# Altium PCB TEST_BOEAD.PcbDoc
Units mil, origin at the board's own origin, x right, y up, seen from the top; angles counter-clockwise.
Board outline 2275 x 3405 mil, 2 copper layers (Top Layer, Bottom Layer); 42 components, 40 nets, 124 pads, 0 vias.
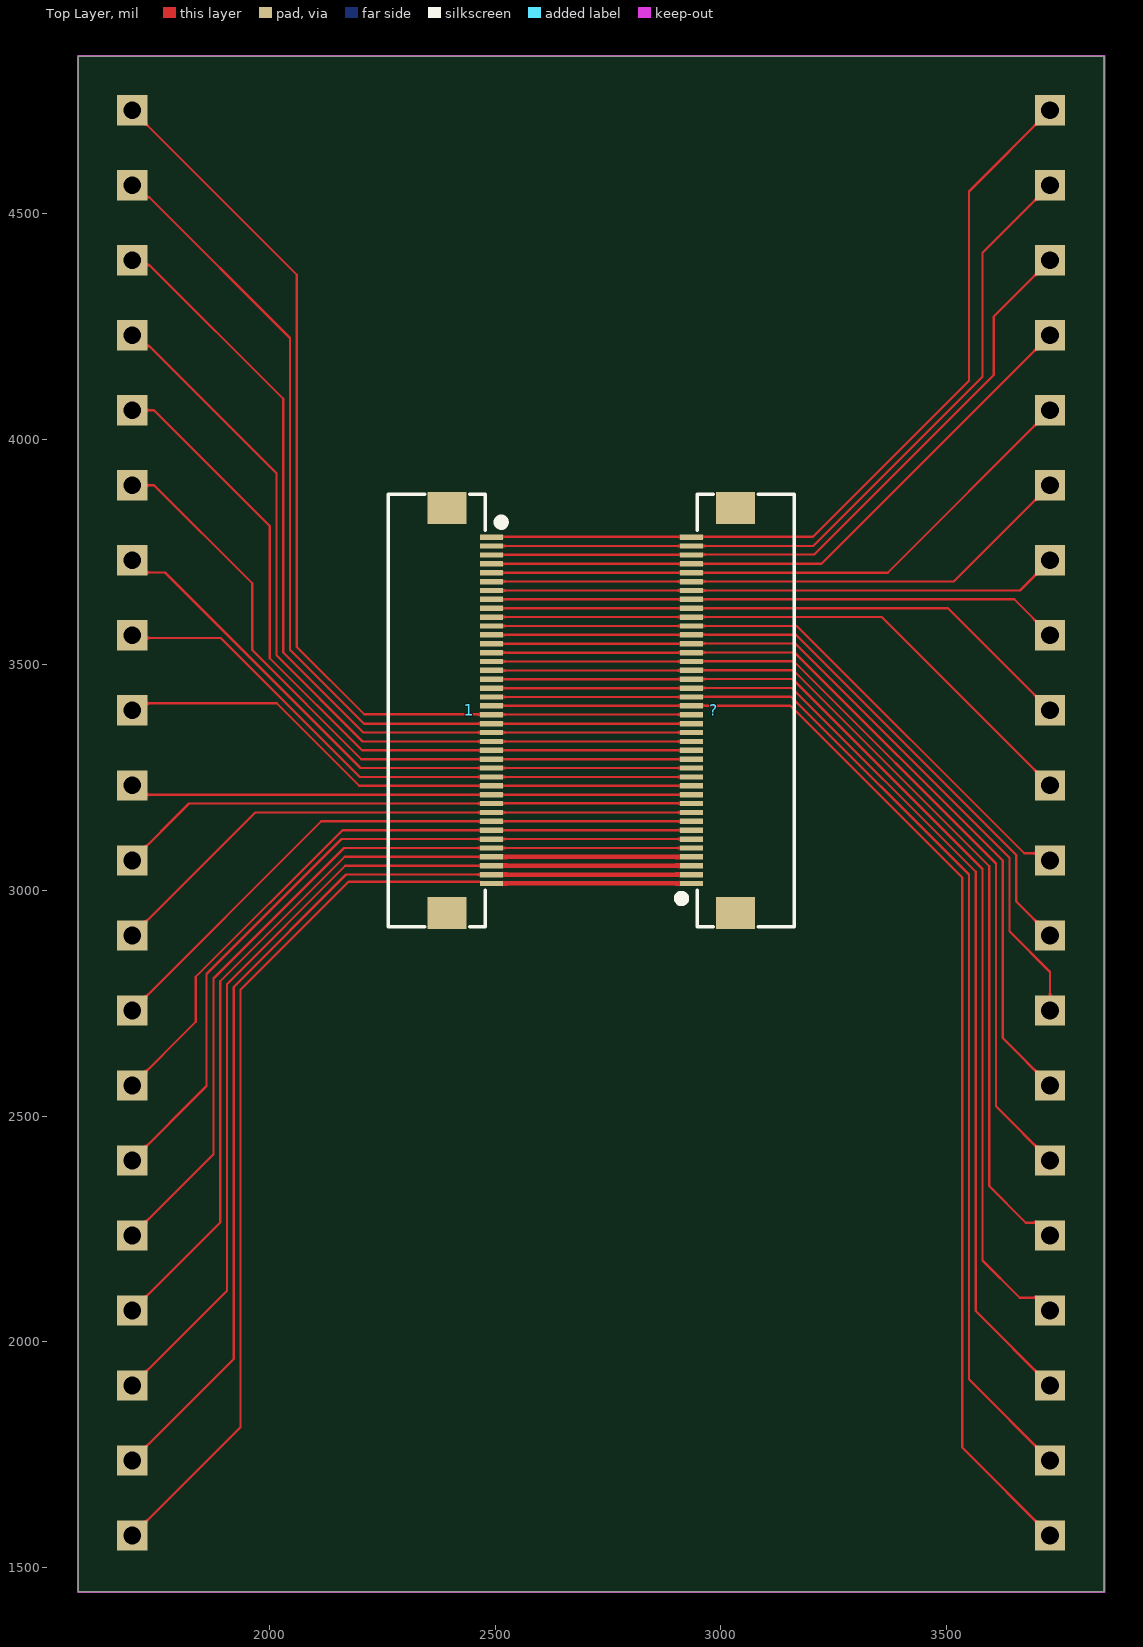
[diagram p0: Top Layer view]
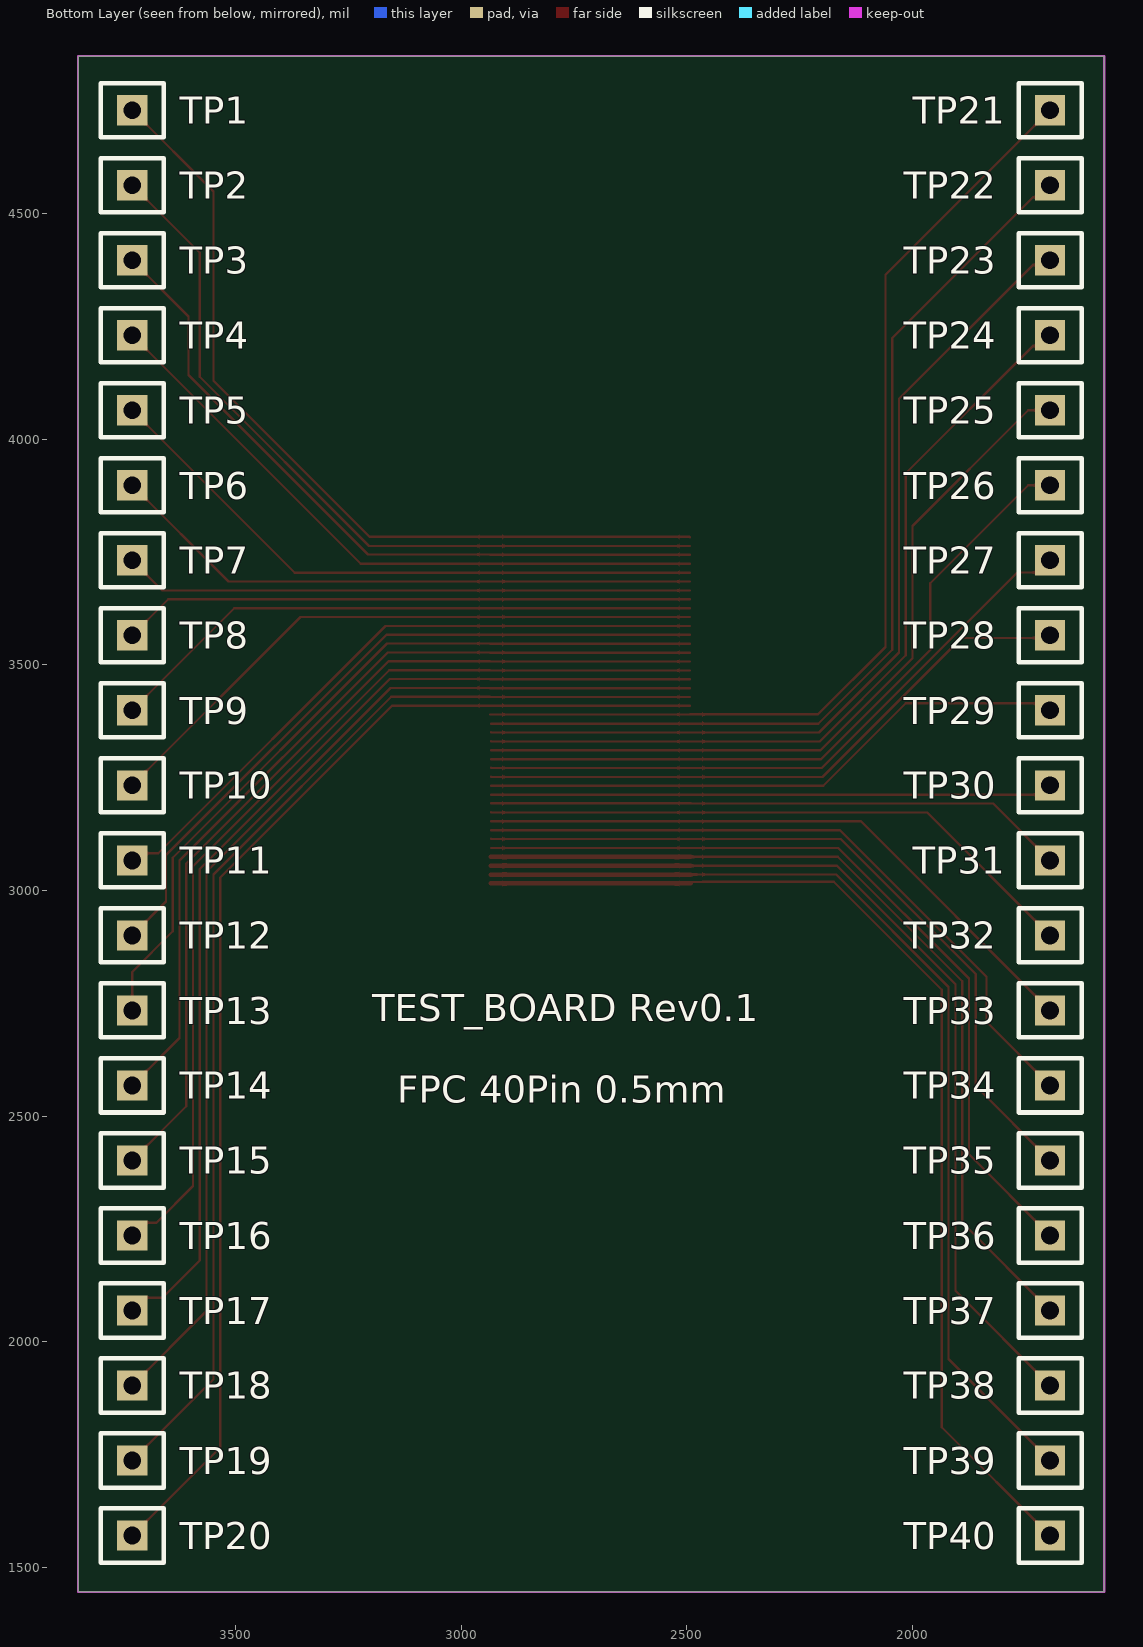
[diagram p1: Bottom Layer view, seen from below]

## Layer stack, top to bottom
Top Solder: solder mask 0.4, Solder Resist, Dk 3.5
Top Layer: signal copper 1.4
Dielectric 1: dielectric 12.6, FR-4, Dk 4.8
Bottom Layer: signal copper 1.4
Bottom Solder: solder mask 0.4, Solder Resist, Dk 3.5

## Board outline
1575,1445 1575,4850 3850,4850 3850,1445

## Design rules (kind name [scope] priority, off if disabled: settings)
Clearance [All] p1: gap=5 ignorepadtopadclearanceinfootprint=FALSE
PolygonConnect [All] p1: connectstyle=Relief reliefconductorwidth=10 reliefentries=4 polygonreliefangle="90 Angle" airgapwidth=10
RoomDefinition Sheet4 [InComponentClass('Sheet4')] p1: confinementstyle=ConfineIn formatcopy=TRUE lockcomponents=FALSE outline 7045,1060 17005,1060 17005,2050 7045,2050
RoutingVias [All] p1: holewidth=7.87 width=15.75 viastyle="Through Hole" minholewidth=7.87 minwidth=15.75 maxholewidth=7.87 maxwidth=15.75
SolderMaskExpansion [All] p1: expansion=4 istentingtop=FALSE
Width [All] p1: maxlimit=20 minlimit=5 preferedwidth=10
30 further rules are at their usual default settings.

## Components (designator, comment, footprint, x,y, rotation, side; value= is the part's Value field where it differs from the comment)
1 "FPC1.0-40P" "FPC0.5 2H-WS-40P" 2393,3399.47 r270 top
? "FPC1.0-40P" "FPC0.5 2H-WS-40P" 3033,3399.47 r90 top
TP1 "TEST TP" "TEST TP1.4_B" 3730,4730 r180 bottom
TP2 "TEST TP" "TEST TP1.4_B" 3730,4563.68 r180 bottom
TP3 "TEST TP" "TEST TP1.4_B" 3730,4397.37 r180 bottom
TP4 "TEST TP" "TEST TP1.4_B" 3730,4231.05 r180 bottom
TP5 "TEST TP" "TEST TP1.4_B" 3730,4064.74 r180 bottom
TP6 "TEST TP" "TEST TP1.4_B" 3730,3898.42 r180 bottom
TP7 "TEST TP" "TEST TP1.4_B" 3730,3732.1 r180 bottom
TP8 "TEST TP" "TEST TP1.4_B" 3730,3565.79 r180 bottom
TP9 "TEST TP" "TEST TP1.4_B" 3730,3399.47 r180 bottom
TP10 "TEST TP" "TEST TP1.4_B" 3730,3233.16 r180 bottom
TP11 "TEST TP" "TEST TP1.4_B" 3730,3066.84 r180 bottom
TP12 "TEST TP" "TEST TP1.4_B" 3730,2900.53 r180 bottom
TP13 "TEST TP" "TEST TP1.4_B" 3730,2734.21 r180 bottom
TP14 "TEST TP" "TEST TP1.4_B" 3730,2567.89 r180 bottom
TP15 "TEST TP" "TEST TP1.4_B" 3730,2401.58 r180 bottom
TP16 "TEST TP" "TEST TP1.4_B" 3730,2235.26 r180 bottom
TP17 "TEST TP" "TEST TP1.4_B" 3730,2068.95 r180 bottom
TP18 "TEST TP" "TEST TP1.4_B" 3730,1902.63 r180 bottom
TP19 "TEST TP" "TEST TP1.4_B" 3730,1736.32 r180 bottom
TP20 "TEST TP" "TEST TP1.4_B" 3730,1570 r180 bottom
TP21 "TEST TP" "TEST TP1.4_B" 1695,4730 r180 bottom
TP22 "TEST TP" "TEST TP1.4_B" 1695,4563.68 r180 bottom
TP23 "TEST TP" "TEST TP1.4_B" 1695,4397.37 r180 bottom
TP24 "TEST TP" "TEST TP1.4_B" 1695,4231.05 r180 bottom
TP25 "TEST TP" "TEST TP1.4_B" 1695,4064.74 r180 bottom
TP26 "TEST TP" "TEST TP1.4_B" 1695,3898.42 r180 bottom
TP27 "TEST TP" "TEST TP1.4_B" 1695,3732.1 r180 bottom
TP28 "TEST TP" "TEST TP1.4_B" 1695,3565.79 r180 bottom
TP29 "TEST TP" "TEST TP1.4_B" 1695,3399.47 r180 bottom
TP30 "TEST TP" "TEST TP1.4_B" 1695,3233.16 r180 bottom
TP31 "TEST TP" "TEST TP1.4_B" 1695,3066.84 r180 bottom
TP32 "TEST TP" "TEST TP1.4_B" 1695,2900.53 r180 bottom
TP33 "TEST TP" "TEST TP1.4_B" 1695,2734.21 r180 bottom
TP34 "TEST TP" "TEST TP1.4_B" 1695,2567.89 r180 bottom
TP35 "TEST TP" "TEST TP1.4_B" 1695,2401.58 r180 bottom
TP36 "TEST TP" "TEST TP1.4_B" 1695,2235.26 r180 bottom
TP37 "TEST TP" "TEST TP1.4_B" 1695,2068.95 r180 bottom
TP38 "TEST TP" "TEST TP1.4_B" 1695,1902.63 r180 bottom
TP39 "TEST TP" "TEST TP1.4_B" 1695,1736.32 r180 bottom
TP40 "TEST TP" "TEST TP1.4_B" 1695,1570 r180 bottom

## Footprints (in the part's own frame and the unit in brackets; to place one, negate y for a bottom-side part, rotate by r counter-clockwise, add the part's x,y. Pads: shape width x height; smd on the part's side, far side on the other; paste and mask are expansions set on the pad)
"FPC0.5 2H-WS-40P" [mm] "长：24.2mm，宽：5.2mm，高：2mm"
  rect 1.8x2.2 smd: 0(-11.4,0) 0(11.4,0)
  rect 0.3x1.3 smd: 1(-9.75,2.497) 2(-9.25,2.497) 3(-8.75,2.497) 4(-8.25,2.497) 5(-7.75,2.497) 6(-7.25,2.497) 7(-6.75,2.497) 8(-6.25,2.497) 9(-5.75,2.497) 10(-5.25,2.497) 11(-4.75,2.497) 12(-4.25,2.497) 13(-3.75,2.497) 14(-3.25,2.497) 15(-2.75,2.497) 16(-2.25,2.497) 17(-1.75,2.497) 18(-1.25,2.497) 19(-0.75,2.497) 20(-0.25,2.497) 21(0.25,2.497) 22(0.75,2.497) 23(1.25,2.497) 24(1.75,2.497) 25(2.25,2.497) 26(2.75,2.497) 27(3.25,2.497) 28(3.75,2.497) 29(4.25,2.497) 30(4.75,2.497) 31(5.25,2.497) 32(5.75,2.497) 33(6.25,2.497) 34(6.75,2.497) 35(7.25,2.497) 36(7.75,2.497) 37(8.25,2.497) 38(8.75,2.497) 39(9.25,2.497) 40(9.75,2.497)
  silkscreen extent -12.18,-3.3 12.18,3.23, body extent -12.1,-3.15 12.1,2.85, height 2
"TEST TP1.4_B" [mm] "蓝色，测试环"
  rect 1.7x1.7 hole 1: 1(0,0)
  silkscreen extent -1.78,-1.52 1.78,1.52, body extent -1.67,-1.4 1.67,1.4, height 5.41

## Part data
1 ?: library part FPC-40P, "FPC连接器", BOM名称=FPC连接器, 学习资源=www.ooocke.com, 版权归属=源创客
TP1 TP2 TP3 TP4 TP5 TP6 TP7 TP8 TP9 TP10 TP11 TP12 TP13 TP14 TP15 TP16 TP17 TP18 TP19 TP20 TP21 TP22 TP23 TP24 TP25 TP26 TP27 TP28 TP29 TP30 TP31 TP32 TP33 TP34 TP35 TP36 TP37 TP38 TP39 TP40: "测试环", BOM名称=测试环, 学习资源=www.ooocke.com, 版权归属=源创客

## Nets (pads, with @x,y where several pads share a name; then routed paths per layer and width w, separated by ;. In a path a pad name is that pad's centre, name@x,y a point inside that pad or via, vN(x,y) a via of type N, cw(c..) or ccw(c..) an arc to the next point about the centre after c; other vN are vias at no path point)
Net1_1: 1.1 ?.40 TP1.1 | length 1874.8
  Top Layer w5: 1.1@2493.31,3783.33 2494.21,3784.24 3204.14,3784.24 3550,4130.1 3550,4550 TP1.1
Net1_2: 1.2 ?.39 TP2.1 | length 1729.1
  Top Layer w5: 1.2@2493.31,3763.65 3204.76,3763.65 3580,4138.88 3580,4413.68 TP2.1
Net1_3: 1.3 ?.38 TP3.1 | length 1582.4
  Top Layer w5: 1.3@2493.83,3744.49 ?.38@2936.69,3744.49 ; ?.38@2936.69,3744.87 3207.2,3744.87 3605,4142.67 3605,4272.37 TP3.1
Net1_4: 1.4 ?.37 TP4.1 | length 1446.6
  Top Layer w5: 1.4@2493.31,3724.28 3223.22,3724.28 TP4.1
Net1_5: 1.5 ?.36 TP5.1 | length 1385.9
  Top Layer w5: 1.5@2493.31,3704.59 3369.86,3704.59 TP5.1
Net1_6: 1.6 ?.35 TP6.1 | length 1325.1
  Top Layer w5: 1.6@2493.31,3684.91 3516.49,3684.91 TP6.1
Net1_7: 1.7 ?.34 TP7.1 | length 1264.4
  Top Layer w5: 1.7@2493.31,3665.22 3663.12,3665.22 TP7.1
Net1_8: 1.8 ?.33 TP8.1 | length 1269.7
  Top Layer w5: 1.8@2493.31,3645.54 2936.69,3645.54 3650.25,3645.54 TP8.1
Net1_9: 1.9 ?.32 TP9.1 | length 1330.5
  Top Layer w5: 1.9@2493.31,3625.85 3503.62,3625.85 TP9.1
Net1_10: 1.10 ?.31 TP10.1 | length 1391.2
  Top Layer w5: 1.10@2493.31,3606.17 3356.99,3606.17 TP10.1
Net1_11: 1.11 ?.30 TP11.1 | length 1451.9
  Top Layer w5: 1.11@2493.31,3586.48 2936.69,3586.48 3168.52,3586.48 3672.39,3082.61 3714.24,3082.61 TP11.1
Net1_12: 1.12 ?.29 TP12.1 | length 1573.6
  Top Layer w5: 1.12@2493.31,3566.8 2936.69,3566.8 2937.22,3567.32 3166.46,3567.32 3655,3078.79 3655,2975.53 TP12.1
Net1_13: 1.13 ?.28 TP13.1 | length 1719.3
  Top Layer w5: 1.13@2493.31,3547.11 2936.69,3547.11 2937.22,3547.64 3164.94,3547.64 3640,3072.57 3640,2909.45 3730,2819.45 TP13.1
Net1_14: 1.14 ?.27 TP14.1 | length 1865.1
  Top Layer w5: 1.14@2493.31,3527.43 2936.69,3527.43 2937.22,3527.95 3163.41,3527.95 3625,3066.36 3625,2672.89 TP14.1
Net1_15: 1.15 ?.26 TP15.1 | length 2010.8
  Top Layer w5: 1.15@2493.31,3507.74 2936.69,3507.74 2937.22,3508.27 3161.88,3508.27 3610,3060.15 3610,2521.58 TP15.1
Net1_16: 1.16 ?.25 TP16.1 | length 2171.3
  Top Layer w5: 1.16@2493.31,3488.06 2936.69,3488.06 2937.22,3488.58 3160.35,3488.58 3595,3053.93 3595,2345 3676.27,2263.73 3701.54,2263.73 TP16.1
Net1_17: 1.17 ?.24 TP17.1 | length 2325.3
  Top Layer w5: 1.17@2493.31,3468.37 2493.57,3468.63 2936.43,3468.63 2936.69,3468.37 2937.22,3468.9 3158.82,3468.9 3580,3047.72 3580,2180 3662.59,2097.41 3701.54,2097.41 TP17.1
Net1_18: 1.18 ?.23 TP18.1 | length 2448
  Top Layer w5: 1.18@2493.31,3448.69 2936.69,3448.69 2937.22,3449.21 3157.3,3449.21 3565,3041.51 3565,2067.63 TP18.1
Net1_19: 1.19 ?.22 TP19.1 | length 2593.7
  Top Layer w5: 1.19@2493.31,3429 2936.69,3429 2937.22,3429.53 3155.77,3429.53 3550,3035.29 3550,1916.32 TP19.1
Net1_20: 1.20 ?.21 TP20.1 | length 2737.8
  Top Layer w5: 1.20@2493.83,3409.84 ?.21@2936.69,3409.84 ; ?.21@2937.6,3409.84 3154.24,3409.84 3535,3029.08 3535,1765 TP20.1
Net1_21: 1.21 ?.20 TP21.1 | length 2279.3
  Top Layer w5: TP21.1 2060,4365 2060,3540 2209.46,3390.54 1.21@2493.31,3390.54 ; 1.21@2493.84,3390.16 ?.20@2936.69,3390.16
Net1_22: 1.22 ?.19 TP22.1 | length 2139.3
  Top Layer w5: TP22.1 1721.72,4536.96 1733.04,4536.96 2045,4225 2045,3533.79 2208.84,3369.95 2934.17,3369.95 ?.19@2934.69,3370.47
Net1_23: 1.23 ?.18 TP23.1 | length 2003.1
  Top Layer w5: TP23.1 1705.4,4386.96 1733.04,4386.96 2030,4090 2030,3527.57 2207.31,3350.26 2934.17,3350.26 ?.18@2934.69,3350.79
Net1_24: 1.24 ?.17 TP24.1 | length 1849.3
  Top Layer w5: TP24.1 1719.09,4206.96 1733.04,4206.96 2015,3925 2015,3521.36 2205.78,3330.58 2934.17,3330.58 ?.17@2934.69,3331.1
Net1_25: 1.25 ?.16 TP25.1 | length 1723.8
  Top Layer w5: TP25.1 1743.46,4064.74 2000,3808.2 2000,3515.15 2204.26,3310.89 2934.17,3310.89 ?.16@2934.69,3311.42
Net1_26: 1.26 ?.15 TP26.1 | length 1578.1
  Top Layer w5: TP26.1 1743.46,3898.42 1960.93,3680.95 1960.93,3533 2202.73,3291.21 2934.17,3291.21 ?.15@2934.69,3291.73
Net1_27: 1.27 ?.14 TP27.1 | length 1430.7
  Top Layer w5: TP27.1 1722.1,3705 1767.72,3705 2201.2,3271.52 2934.17,3271.52 ?.14@2934.69,3272.05
Net1_28: 1.28 ?.13 TP28.1 | length 1370
  Top Layer w5: TP28.1 1700.79,3560 1891.51,3560 2199.67,3251.84 2934.17,3251.84 ?.13@2934.69,3252.36
Net1_29: 1.29 ?.12 TP29.1 | length 1322.1
  Top Layer w5: TP29.1 1710.53,3415 2015.29,3415 2198.14,3232.15 2934.17,3232.15 ?.12@2934.69,3232.68
Net1_30: 1.30 ?.11 TP30.1 | length 1248.5
  Top Layer w5: TP30.1 1715.69,3212.47 2934.17,3212.47 ?.11@2934.69,3212.99
Net1_31: 1.31 ?.10 TP31.1 | length 1292.1
  Top Layer w5: TP31.1 1820.94,3192.78 1.31 2491.84,3193.31 ?.10@2934.69,3193.31
Net1_32: 1.32 ?.9 TP32.1 | length 1352.8
  Top Layer w5: TP32.1 1967.57,3173.1 2934.17,3173.1 ?.9@2934.69,3173.62
Net1_33: 1.33 ?.8 TP33.1 | length 1413.5
  Top Layer w5: TP33.1 2114.2,3153.41 2934.17,3153.41 ?.8@2934.69,3153.94
Net1_34: 1.34 ?.7 TP34.1 | length 1534.7
  Top Layer w5: TP34.1 1836.16,2709.06 1836.16,2808.84 2161.05,3133.73 1.34@2493.31,3133.73 ; 1.34 2934.17,3133.73 ?.7@2934.69,3134.25
Net1_35: 1.35 ?.6 TP35.1 | length 1682.5
  Top Layer w5: TP35.1 1860,2566.58 1860,2815 2159.04,3114.04 1.35@2493.31,3114.04 ; 1.35 2934.17,3114.04 ?.6@2934.69,3114.57
Net1_36: 1.36 ?.5 TP36.1 | length 1823.8
  Top Layer w5: TP36.1 1875,2415.26 1875,2804.85 2164.5,3094.35 1.36 ?.5
Net1_37: 1.37 ?.4 TP37.1 | length 1969.5
  Top Layer w5: TP37.1 1890,2263.95 1890,2798.64 2166.03,3074.67 1.37
  Top Layer w10: 1.37 ?.4
Net1_38: 1.38 ?.3 TP38.1 | length 2115.2
  Top Layer w5: TP38.1 1905,2112.63 1905,2792.43 2167.56,3054.98 1.38
  Top Layer w10: 1.38 ?.3
Net1_39: 1.39 ?.2 TP39.1 | length 2261
  Top Layer w5: TP39.1 1920,1961.32 1920,2786.21 2169.09,3035.3 1.39
  Top Layer w10: 1.39 ?.2
Net1_40: 1.40 ?.1 TP40.1 | length 2409.8
  Top Layer w5: TP40.1 1935,1810 1935,2780 2174.4,3019.4 2465.29,3019.4 2465.66,3019.02 2487.9,3019.02 1.40
  Top Layer w10: 1.40 ?.1
pads on no net: 1.0 ?.0

## Keep-outs
Keep-Out Layer:
  the board outline again, w5

## Silkscreen, mask and mechanical layers (free items; w line width, h text height)
Bottom Overlay:
  text "TEST_BOARD Rev0.1" at 3197.84,2710 h60
  text "FPC 40Pin 0.5mm" at 3142.86,2530 h60
Mechanical 1:
  the board outline again, w5

## Dimensions
1575,4850 to 1575,1445 on Mechanical 15
1575,1445 to 3850,1445 on Mechanical 15